# EAGLE board neckmed-3 (EAGLE 9.6.2)
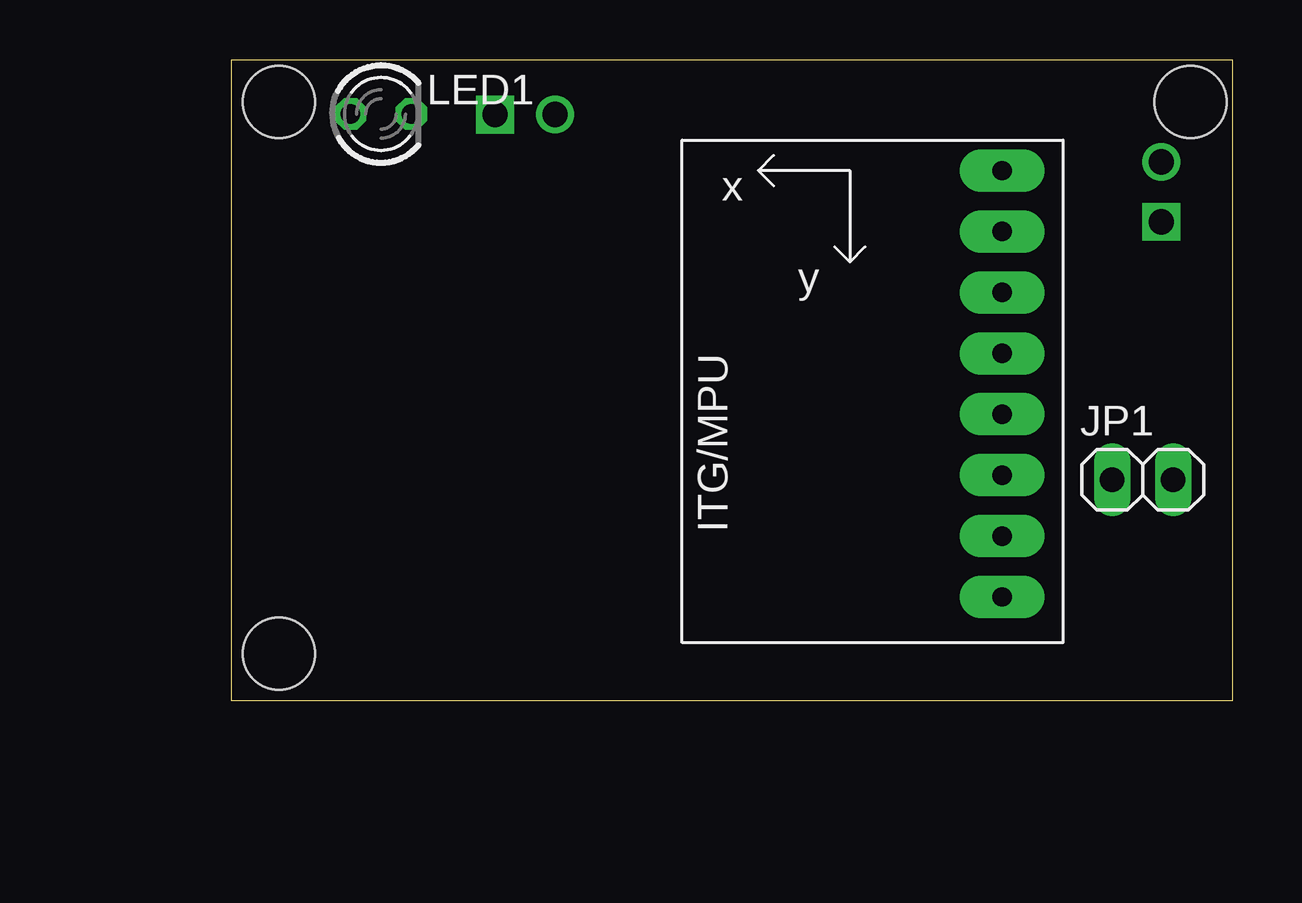
[diagram p0: board, top side]
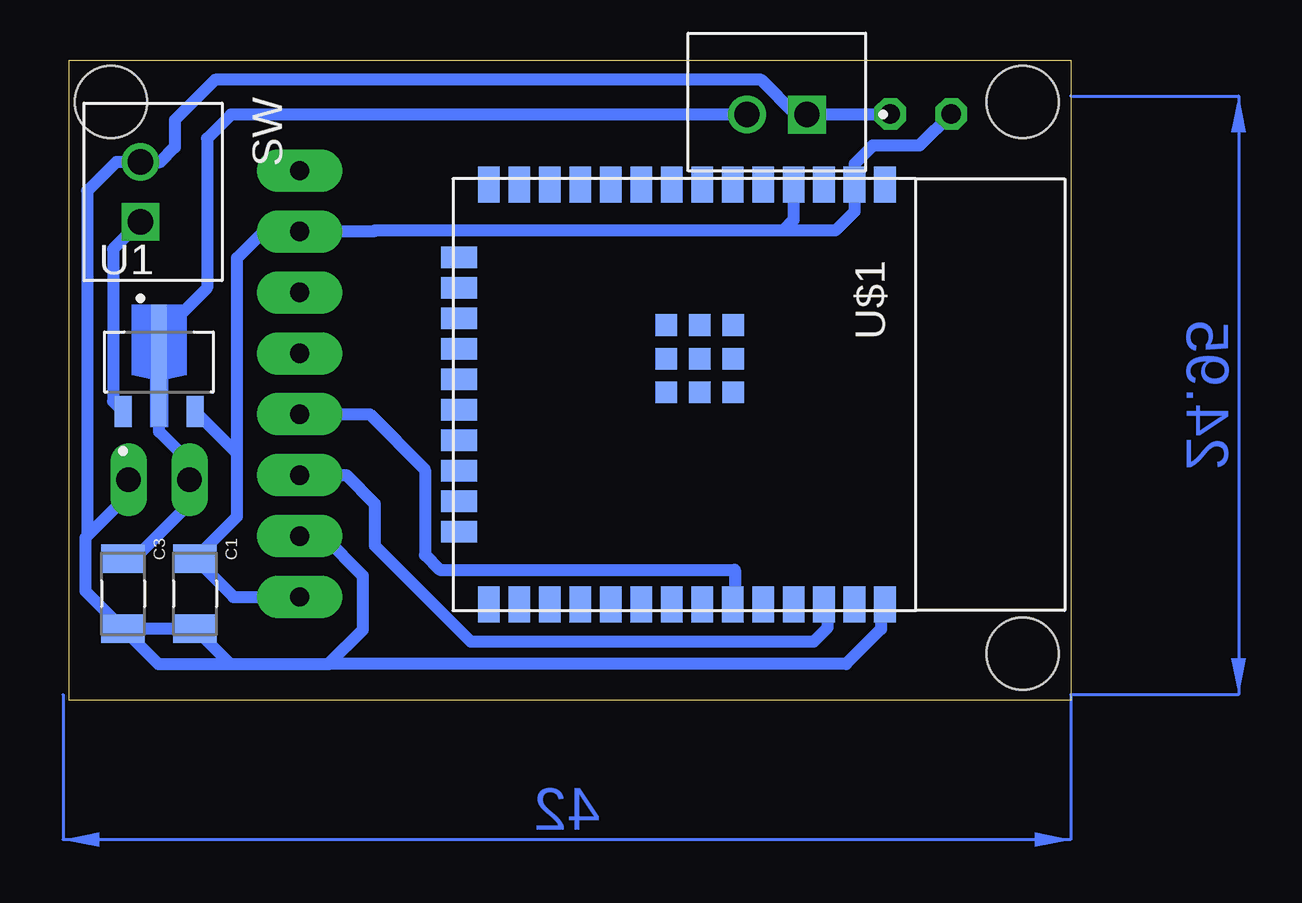
[diagram p1: board, bottom side, seen from below]

Size 41.75 x 26.7 mm. Coordinates in mm from the lower left corner, seen from the top.
Outline: 0,0 41.75,0 41.75,26.7 0,26.7 0,0
Copper layers (1*16): Top 0.035mm / dielectric 1.5mm / Bottom 0.035mm
Design rules "default *": minimum track width 10mil, minimum drill 0.35mm, track to track 16mil, track to pad 16mil, pad to pad 16mil, via to via 16mil, smd to smd 16mil, copper to edge 16mil, drill to drill 16mil, minimum pad ring 10mil, minimum via ring 8mil, stop-mask expansion 4mil, vias tented up to drill 0mil, thermal gap 10mil
Holes 3 mm at 2,24.95 40,24.95 2,1.95

## Footprints (pad centres in the part's own frame; a part is rotated, then mirrored left to right if it is on the bottom)
CAPC3216X180N = smd 1.2 x 1.82: 1 -1.46,0; 2 1.46,0
JST_B2B-XH-A = drill 1.05 square: 1 1.25,-0.525 | drill 1.05: 2 -1.25,-0.525
1X02 = drill 1.016 long: 1 -1.27,0; 2 1.27,0
LED3MM = drill 0.813 octagon: A -1.27,0; K 1.27,0
IC_HT7333 = smd 0.7 x 1.3: 1 -1.5,-1.9; 3 1.5,-1.9 | smd 0.66 x 5.08: 2 -0.005,0
GY-521 = drill 0.8 pad 1.778 long: ADO -8.89,-6.35; GND -8.89,6.35; INT -8.89,-8.89; SCL -8.89,3.81; SDA -8.89,1.27; VCC -8.89,8.89; XCL -8.89,-3.81; XDA -8.89,-1.27
ESP32-WROOM-32E = smd 1.5 x 0.9: 1 -8.75,8.255; 2 -8.75,6.985; 3 -8.75,5.715; 4 -8.75,4.445; 5 -8.75,3.175; 6 -8.75,1.905; 7 -8.75,0.635; 8 -8.75,-0.635; 9 -8.75,-1.905; 10 -8.75,-3.175; 11 -8.75,-4.445; 12 -8.75,-5.715; 13 -8.75,-6.985; 14 -8.75,-8.255; 25 8.75,-8.255; 26 8.75,-6.985; 27 8.75,-5.715; 28 8.75,-4.445; 29 8.75,-3.175; 30 8.75,-1.905; 31 8.75,-0.635; 32 8.75,0.635; 33 8.75,1.905; 34 8.75,3.175; 35 8.75,4.445; 36 8.75,5.715; 37 8.75,6.985; 38 8.75,8.255 | smd 0.9 x 1.5: 15 -5.715,-9.505; 16 -4.445,-9.505; 17 -3.175,-9.505; 18 -1.905,-9.505; 19 -0.635,-9.505; 20 0.635,-9.505; 21 1.905,-9.505; 22 3.175,-9.505; 23 4.445,-9.505; 24 5.715,-9.505 | smd 0.9 x 0.9: GND@39 -2.9,1.935; GND@40 -1.5,1.935; GND@41 -0.1,1.935; GND@42 -2.9,0.535; GND@43 -1.5,0.535; GND@44 -0.1,0.535; GND@45 -2.9,-0.865; GND@46 -1.5,-0.865; GND@47 -0.1,-0.865

## Placement (x,y rotation side)
C1  CL31B106KAHNNNE  [CAPC3216X180N]  36.5,4.45 270 bottom
C3  CL31B106KAHNNNE  [CAPC3216X180N]  39.5,4.45 270 bottom
CHARGER  B2B-XH-A  [JST_B2B-XH-A]  12.25,24.95 0 bottom
JP1  [1X02]  38,9.2 0 top
LED1  TLLR4400  [LED3MM]  6.25,24.45 0 top
SW  B2B-XH-A  [JST_B2B-XH-A]  38.25,21.2 270 bottom
U1  HT7333  [IC_HT7333]  38,13.95 0 bottom
U2  GY-521MPU6050  [GY-521]  23.25,13.2 180 top
U$1  ESP32-WROOM-32E  [ESP32-WROOM-32E]  16,12.75 270 bottom

## Library data of the parts
C1 C3 = CL31B106KAHNNNE; AVAILABILITY: In Stock; CHECK_PRICES: https://www.snapeda.com/parts/CL31B106KAHNNNE/Samsung+Electro-Mechanics/view-part/?ref=eda; DESCRIPTION: CL31 Series 10 uF 25 V ±10 % Tolerance X7R SMT Multilayer Ceramic Capacitor; MF: Samsung Electro-Mechanics; MP: CL31B106KAHNNNE; PACKAGE: 1206 Samsung; PRICE: None; PURCHASE-URL: https://www.snapeda.com/api/url_track_click_mouser/?unipart_id=570537&manufacturer=Samsung Electro-Mechanics&part_name=CL31B106KAHNNNE&search_term=capacitor smd 1206 samsung cl31; SNAPEDA_LINK: https://www.snapeda.com/parts/CL31B106KAHNNNE/Samsung+Electro-Mechanics/view-part/?ref=snap
CHARGER SW = B2B-XH-A; AVAILABILITY: In Stock; CHECK_PRICES: https://www.snapeda.com/parts/B2B-XH-A/JST+Sales+America+Inc./view-part/?ref=eda; DESCRIPTION: Connector Header Through Hole 2 position 0.098 (2.50mm); MF: JST Sales; MP: B2B-XH-A; PACKAGE: None; PRICE: None; PURCHASE-URL: https://www.snapeda.com/api/url_track_click_mouser/?unipart_id=552747&manufacturer=JST Sales&part_name=B2B-XH-A&search_term=jwt xh; SNAPEDA_LINK: https://www.snapeda.com/parts/B2B-XH-A/JST+Sales+America+Inc./view-part/?ref=snap
JP1 = pinhead
LED1 = led; MF: VISHAY SEMICONDUCTOR; OC_FARNELL: 1612437
U1 = HT7333; AVAILABILITY: Not in stock; CHECK_PRICES: https://www.snapeda.com/parts/HT7333/Holtek/view-part/?ref=eda; DESCRIPTION: Three-terminal, low power, high voltage regulator implemented in CMOS technology; MF: Holtek Semiconductor; MP: HT7333; PACKAGE: None; PRICE: None; SNAPEDA_LINK: https://www.snapeda.com/parts/HT7333/Holtek/view-part/?ref=snap
U2 = GY-521; AVAILABILITY: Not in stock; CHECK_PRICES: https://www.snapeda.com/parts/GY-521/GODREAM+FORDREAM+CO.%252C+LIMITED/view-part/?ref=eda; DESCRIPTION: Triple Axis Accelerometer Gyro Breakout; MF: GODREAM FORDREAM CO., LIMITED; MP: GY-521; PACKAGE: Package; PRICE: None; SNAPEDA_LINK: https://www.snapeda.com/parts/GY-521/GODREAM+FORDREAM+CO.%252C+LIMITED/view-part/?ref=snap
U$1 = ESP32-WROOM-32E; AVAILABILITY: In Stock; CHECK_PRICES: https://www.snapeda.com/parts/ESP32-WROOM-32E/Espressif+Systems/view-part/?ref=eda; DESCRIPTION: RX TXRX MOD WIFI TRACE ANT SMD; MF: Espressif Systems; MP: ESP32-WROOM-32E; PACKAGE: SMD-44 Espressif Systems; PRICE: None; SNAPEDA_LINK: https://www.snapeda.com/parts/ESP32-WROOM-32E/Espressif+Systems/view-part/?ref=snap

## Nets
GND: C1.2 C3.2 CHARGER.1 JP1.2 LED1.K SW.2 U2.GND U$1.38
N$1: C3.1 CHARGER.2 JP1.1 U1.2
N$2: SW.1 U1.1
N$8: U2.SCL U$1.36
N$9: U2.SDA U$1.33
VCC: C1.1 LED1.A U1.3 U2.ADO U2.VCC U$1.2 U$1.4

## Tracks (layer width: path | path; a pad name or v marks a point on that pad's centre or on a via)
GND
  Bottom 0.508: 35.03,1.52 38.03,1.52 C3.2 | 35.03,1.52 30.93,1.52 | 30.93,1.52 29.5,2.95 29.5,5.2 31.15,6.85 U2.GND | C3.2 C1.2 35.03,1.52 | JP1.2 39.27,8.58 41,6.85 | C3.2 41.07,4.56 41.07,6.78 41,6.85 | 41,6.85 41,21.23 39.78,22.45 SW.2 37.95,22.45 37.34,23.05 37.34,24.2 35.67,25.87 12.9,25.87 11.45,24.43 CHARGER.1 7.54,24.43 LED1.K | U$1.38 7.91,3.84 7.91,2.98 9.36,1.52 30.93,1.52
N$1
  Bottom 0.508: C3.1 39.02,5.91 36.75,8.18 36.75,9.18 JP1.1 36.73,9.93 38.01,11.21 U1.2 38.01,15.19 36,17.2 36,23.43 35,24.43 CHARGER.2
N$2
  Bottom 0.508: SW.1 39.91,18.81 39.91,12.46 U1.1
N$8
  Bottom 0.508: U$1.36 10.12,3.84 10.12,3.05 10.72,2.45 25,2.45 29,6.45 29,8.2 30.19,9.39 U2.SCL
N$9
  Bottom 0.508: U2.SDA 29.23,11.93 26.91,9.61 26.91,6.06 26.3,5.45 14,5.45 14,4.09 U$1.33
VCC
  Bottom 0.508: 12,19.59 9.81,19.59 9.02,20.39 U$1.2 9.02,22.36 8.25,23.13 6.3,23.13 LED1.A | 12,19.59 28,19.59 29,19.59 29.04,19.55 U2.ADO 33.65,19.55 34.75,18.45 34.75,10.3 | U2.VCC 34.9,4.31 C1.1 34.75,7.66 34.75,10.3 | U1.3 34.75,10.3 | U$1.4 11.55,20.04 12,19.59
(copper drawn outside any net)
  shapes: Bottom area x2